# EAGLE board IV-21VFDsub (EAGLE 9.6.2)
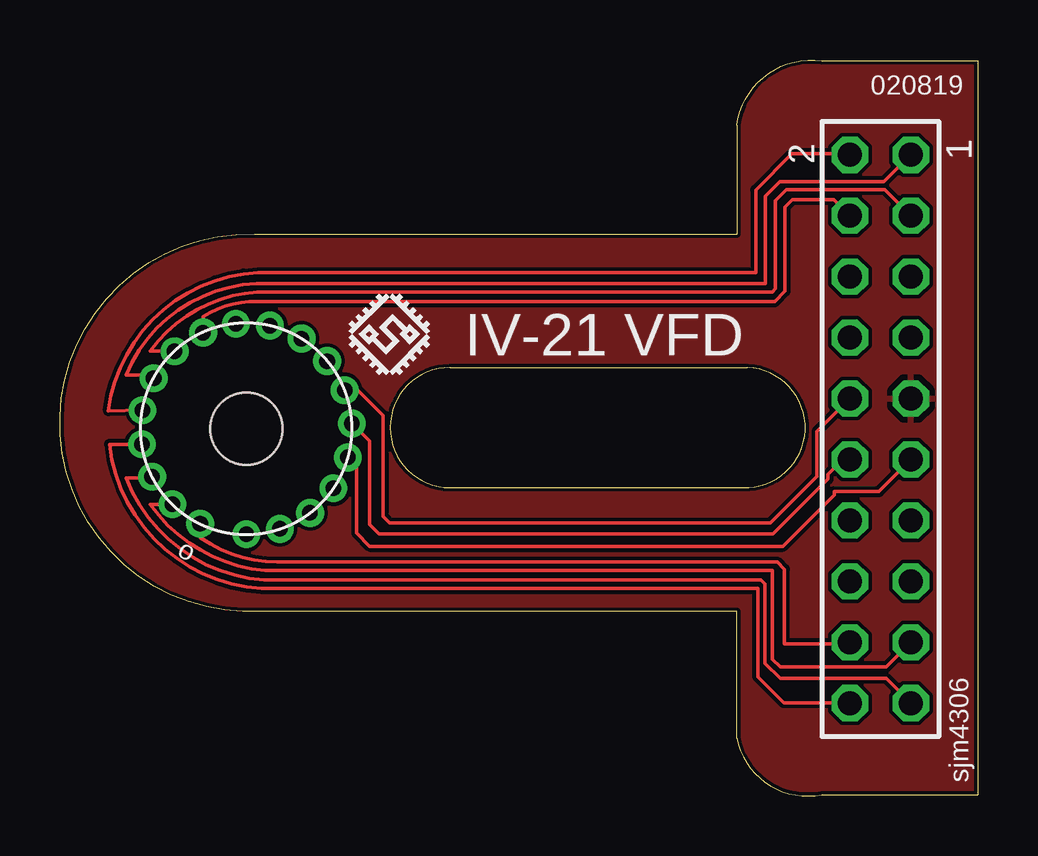
[diagram p0: board, top side]
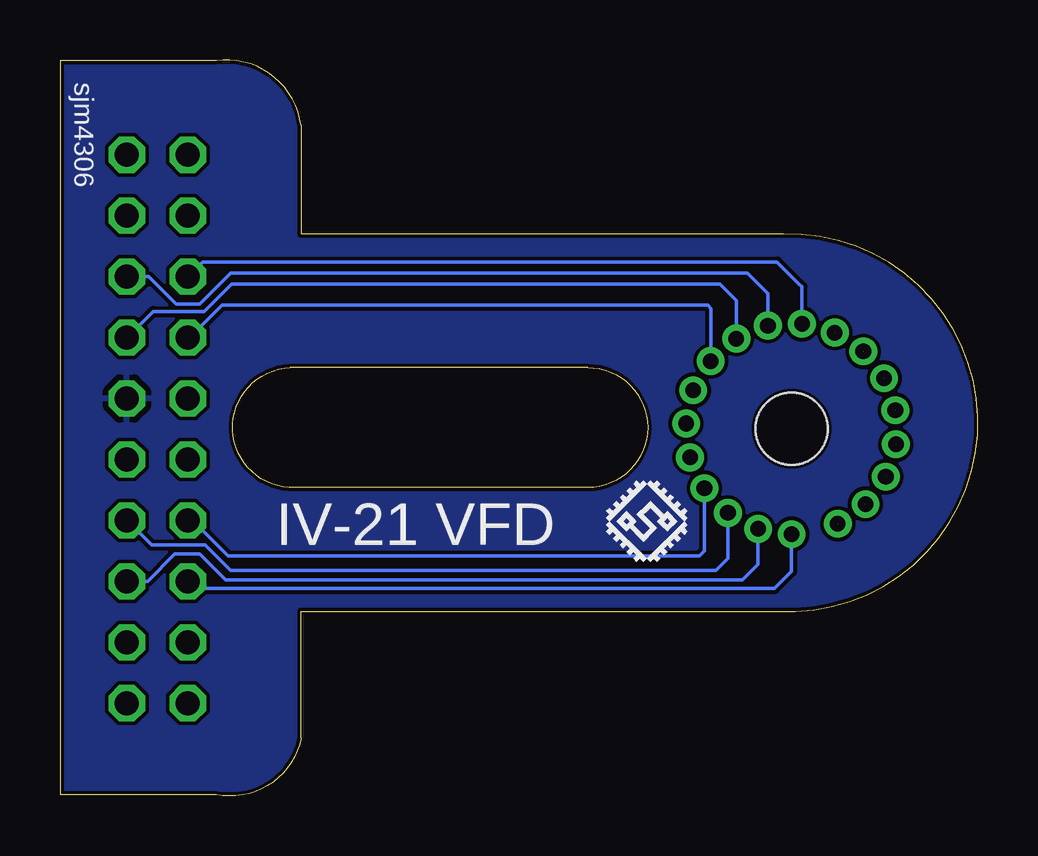
[diagram p1: board, bottom side, seen from below]

Size 38.27 x 30.69 mm. Coordinates in mm from the lower left corner, seen from the top.
Outline: 28.47,12.86 16.27,12.86 arc-180 16.27,17.86 28.67,17.86 arc-180 28.47,12.86
Outline: 28.47,12.86 28.67,12.86
Outline: 31.77,0.06 38.27,0.06 38.27,30.66 31.77,30.66 arc90 28.21,27.96 28.21,23.43 8.11,23.43 arc180 7.61,7.7 28.21,7.7 28.21,2.41 arc90 31.77,0.06
Copper layers (1*16): Top 0.035mm / dielectric 1.5mm / Bottom 0.035mm
Design rules "default *": minimum track width 6mil, minimum drill 0.35mm, track to track 6mil, track to pad 6mil, pad to pad 6mil, via to via 6mil, smd to smd 6mil, copper to edge 6mil, drill to drill 6mil, minimum pad ring 10mil, minimum via ring 8mil, stop-mask expansion 8mil, vias tented up to drill 0mil, thermal gap 10mil
Holes 3 mm at 7.77,15.31

## Footprints (pad centres in the part's own frame; a part is rotated, then mirrored left to right if it is on the bottom)
IV-21VFD = drill 0.65: P$1 0,4.4; P$2 1.4,4.17; P$3 2.66,3.51; P$4 3.63,2.48; P$5 4.23,1.19; P$6 4.39,-0.21; P$7 4.1,-1.6; P$8 3.37,-2.82; P$9 2.3,-3.75; P$10 0.99,-4.3; P$11 -0.43,-4.39; P$12 -1.8,-4.01; P$13 -2.99,-3.24; P$14 -3.86,-2.12; P$15 -4.33,-0.78; P$16 -4.35,0.64; P$17 -3.92,1.99; P$18 -3.08,3.14; P$19 -1.92,3.95
TSW-110-XX-G-D = drill 1 pad 1.5 octagon: 1 11.43,-1.27; 2 11.43,1.27; 3 8.89,-1.27; 4 8.89,1.27; 5 6.35,-1.27; 6 6.35,1.27; 7 3.81,-1.27; 8 3.81,1.27; 9 1.27,-1.27; 10 1.27,1.27; 11 -1.27,-1.27; 12 -1.27,1.27; 13 -3.81,-1.27; 14 -3.81,1.27; 15 -6.35,-1.27; 16 -6.35,1.27; 17 -8.89,-1.27; 18 -8.89,1.27; 19 -11.43,-1.27; 20 -11.43,1.27

## Placement (x,y rotation side)
U$1  IV-21VFD  [IV-21VFD]  7.77,15.31 154.1 top
U$2  [SJM4306_LOGO_SMALL]  13.77,19.26 90 top
U$3  [SJM4306_LOGO_SMALL]  13.77,11.46 90 bottom
X1  TSW-110-07-G-D  [TSW-110-XX-G-D]  34.21,15.3 90 top

## Library data of the parts
U$1 = sjm4306-custom
U$2 U$3 = sjm4306_LOGO
X1 = con-samtec; MF: Samtec Inc.; MPN: TSW-110-07-G-D

## Nets
A: U$1.P$5 X1.2
B: U$1.P$3 X1.19
C: U$1.P$18 X1.15
D: U$1.P$17 X1.13
DP: U$1.P$16 X1.14
E: U$1.P$19 X1.16
F: U$1.P$4 X1.20
F1: U$1.P$1 X1.18
F2: U$1.P$10 X1.5
G: U$1.P$2 X1.17
G1: U$1.P$6 X1.1
G2: U$1.P$15 X1.11
G3: U$1.P$7 X1.3
G4: U$1.P$14 X1.12
G5: U$1.P$8 X1.4
G6: U$1.P$13 X1.10
G7: U$1.P$9 X1.6
G8: U$1.P$12 X1.8
G9: U$1.P$11 X1.7
GND: X1.9

## Tracks (layer width: path | path; a pad name or v marks a point on that pad's centre or on a via)
A  (1 unrouted)
  Top 0.152: U$1.P$5 2.02,16.06 arc-80 8.26,21.82 29.01,21.82 29.01,25.27 30.52,26.78 32.89,26.78 X1.2
B  (1 unrouted)
  Top 0.152: U$1.P$3 3.8,13.26 2.77,13.26 arc65 8.52,9 29.22,9 29.39,8.83 29.39,5.53 30.02,4.9 34.44,4.9 X1.19
C
  Bottom 0.152: U$1.P$18 9.16,9.66 9.82,9 31.36,9 32.45,10.09 33.47,10.09 34.61,8.95 X1.15
D
  Bottom 0.152: U$1.P$17 10.42,9.9 10.92,9.41 31.16,9.41 32.21,10.47 34.45,10.47 X1.13
DP
  Bottom 0.152: U$1.P$16 11.4,10.23 11.62,10.01 31.25,10.01 32.74,11.49 X1.14
E
  Bottom 0.152: U$1.P$19 7.77,9.36 8.48,8.65 32.63,8.65 X1.16
F  (1 unrouted)
  Top 0.152: U$1.P$4 2.07,14.66 arc80 8.41,8.65 29.09,8.65 29.09,4.97 30.17,3.89 32.92,3.89 X1.20
F1  (1 unrouted)
  Top 0.152: U$1.P$1 arc-90 5.87,11.32 5.87,10.76 arc35 9.05,9.75 29.9,9.75 30.21,9.45 30.21,6.34 32.87,6.34 X1.18
F2
  Bottom 0.152: U$1.P$10 8.75,20.95 9.62,21.81 31.15,21.81 32.45,20.52 33.42,20.52 34.56,21.65 X1.5
G  (1 unrouted)
  Top 0.152: U$1.P$2 arc-90 U$1.P$2 3.77,12.16 arc50 8.56,9.4 29.7,9.4 29.7,5.7 30.03,5.38 34.44,5.38 X1.17
G1  (1 unrouted)
  Top 0.152: U$1.P$6 arc90 3.75,17.56 2.77,17.56 arc-65 8.2,21.37 29.41,21.37 29.41,25.01 30.01,25.61 34.35,25.61 X1.1
G2
  Top 0.152: U$1.P$15 12.37,13.75 12.37,10.96 12.91,10.41 30.14,10.41 32.27,12.55 32.27,12.69 34.14,12.69 X1.11
G3  (1 unrouted)
  Top 0.152: U$1.P$7 arc90 4.75,18.56 3.77,18.56 arc-50 8.23,21.01 29.69,21.01 29.82,21.15 29.82,24.82 30.27,25.27 34.39,25.27 X1.3
G4
  Top 0.152: U$1.P$14 12.9,14.79 12.9,11.33 13.3,10.92 29.73,10.92 32.02,13.21 32.02,13.41 32.64,14.03 X1.12
G5  (1 unrouted)
  Top 0.152: U$1.P$8 5.97,19.98 arc-35 8.23,20.61 29.8,20.61 30.23,21.04 30.23,24.56 30.54,24.87 32.26,24.87 X1.4
G6
  Top 0.152: U$1.P$13 12.41,16.92 13.47,15.86 13.47,11.66 13.75,11.38 29.62,11.38 31.56,13.32 31.56,15.2 X1.10
G7
  Bottom 0.152: U$1.P$9 7.33,21.23 7.45,21.35 7.47,21.35 8.38,22.26 32.33,22.26 X1.6
G8
  Bottom 0.152: U$1.P$12 11.14,20.33 11.27,20.46 31.51,20.46 32.86,19.11 X1.8
G9
  Bottom 0.152: U$1.P$11 10.07,20.66 10.75,21.35 31.11,21.35 32.25,20.21 34.38,20.21 X1.7
GND
  pour Top: -4.03,-0.54 -4.03,25.16 3.97,33.16 41.87,33.16 44.97,30.06 44.97,2.76 39.27,-2.94 -1.63,-2.94
  pour Bottom: -6.03,6.26 -6.03,23.36 2.57,31.96 40.37,31.96 43.07,29.26 43.07,2.46 37.97,-2.64 -0.13,-2.64 -4.63,1.86 -6.03,3.26

## Text on the board
tPlace: 020819 | sjm4306
bPlace: sjm4306
tNames: IV-21 VFD
bNames: IV-21 VFD